# Altium PCB TANK_PCB.PcbDoc
Units mm, origin at the board's own origin, x right, y up, seen from the top; angles counter-clockwise.
Board outline 53.85 x 58.29 mm, 2 copper layers (Top Layer, Bottom Layer); 13 components, 16 nets, 86 pads, 0 vias.
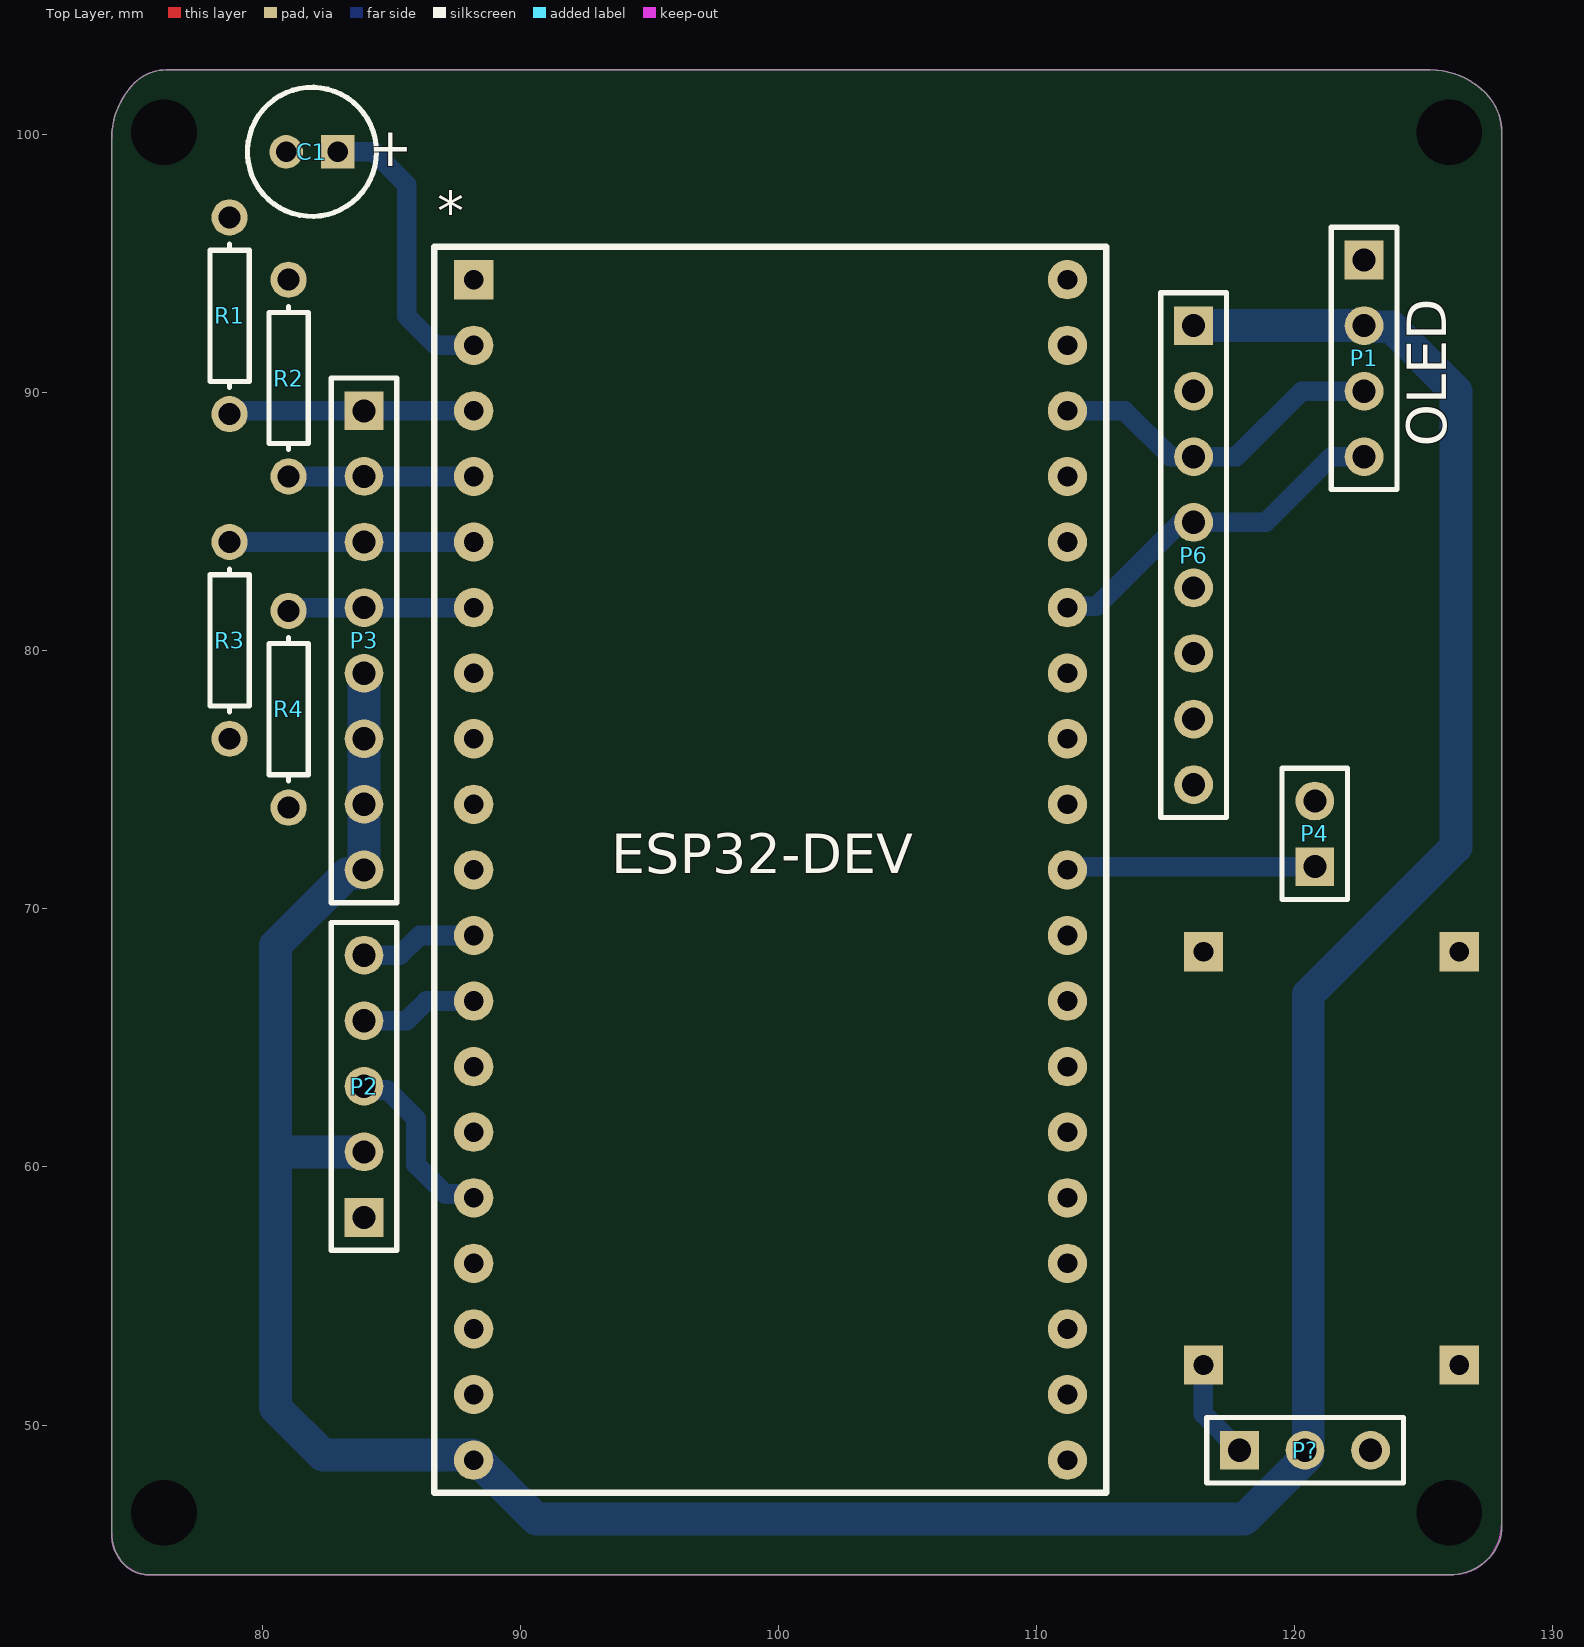
[diagram p0: Top Layer view]
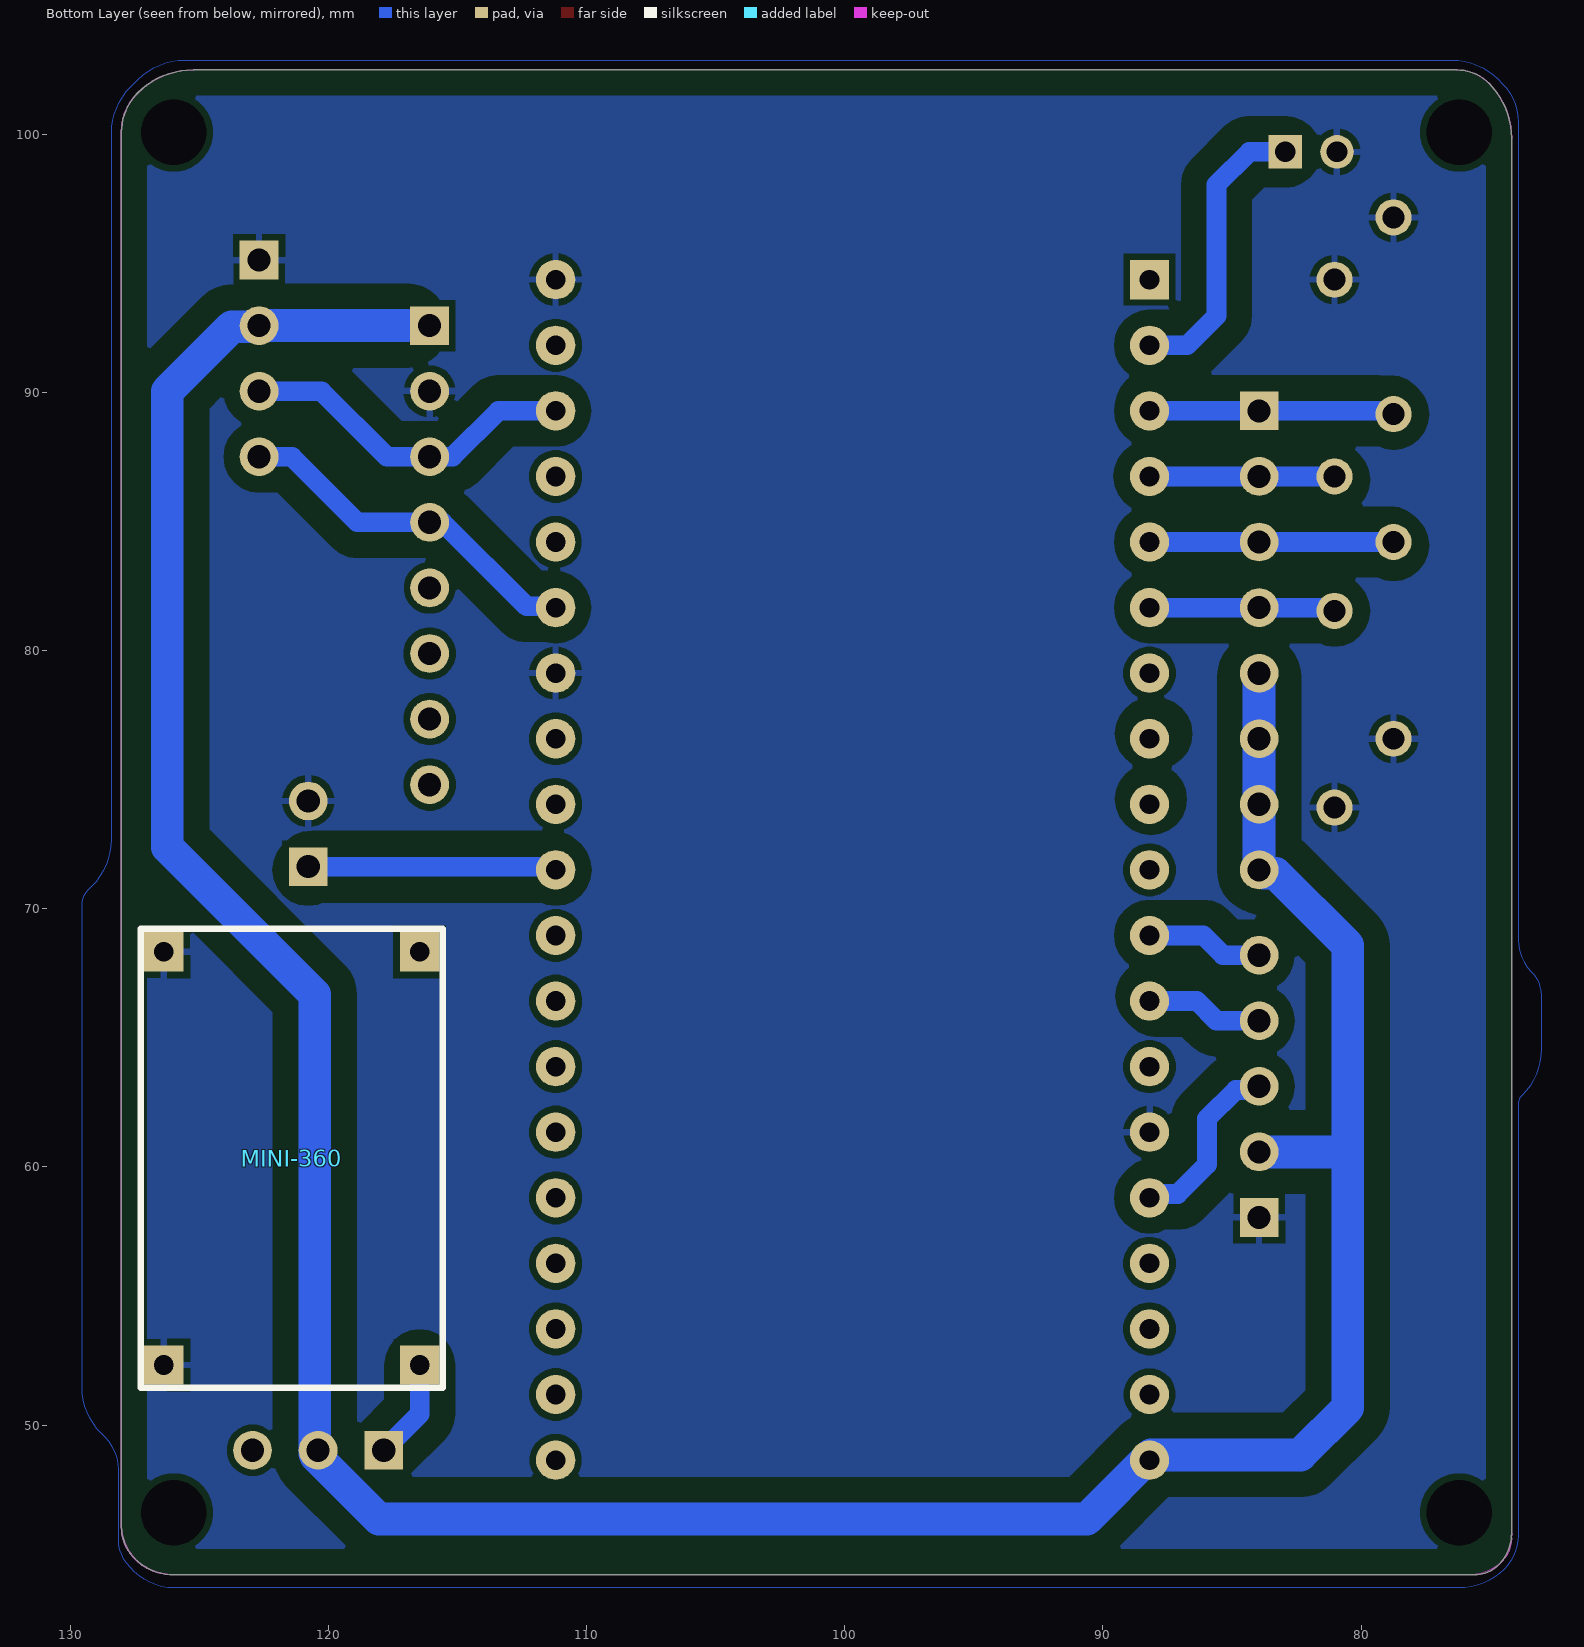
[diagram p1: Bottom Layer view, seen from below]

## Layer stack, top to bottom
Top Solder: solder mask 0.0102, Solder Resist, Dk 3.5
Top Layer: signal copper 0.0356
Dielectric 1: dielectric 0.32, FR-4, Dk 4.8
Bottom Layer: signal copper 0.0356
Bottom Solder: solder mask 0.0102, Solder Resist, Dk 3.5

## Board outline
74.676,44.577 cw(c75.902,45.803) 74.168,45.803 74.168,99.835 cw(c77.203,99.835) 75.057,101.981 cw(c76.283,100.755) 76.283,102.489 125.235,102.489 cw(c125.235,99.454) 127.381,101.6 cw(c125.848,100.067) 128.016,100.067 128.016,46.057 cw(c126.282,46.057) 127.508,44.831 cw(c125.975,46.364) 125.975,44.196 75.596,44.196 cw(c75.596,45.497)

## Design rules (kind name [scope] priority, off if disabled: settings)
Clearance [All] p1: gap=0.254 ignorepadtopadclearanceinfootprint=FALSE except(0: SMDPad-Hole THPad-Hole Via-Hole Fill-Hole Poly-Hole Region-Hole Text-Hole; 0.127: Arc-Hole Track-Hole; 1: Arc-Arc Arc-Track Arc-Fill Arc-Poly Arc-Region Track-Track Track-Fill Track-Poly Track-Region)
PolygonConnect [All] p1: connectstyle=Relief reliefconductorwidth=0.254 reliefentries=4 polygonreliefangle="90 Angle" airgapwidth=0.254
RoutingVias [All] p1: holewidth=0.711 width=1.27 viastyle="Through Hole" minholewidth=0.711 minwidth=1.27 maxholewidth=0.711 maxwidth=1.27
SolderMaskExpansion [All] p1: expansion=0.102 istentingtop=FALSE
Width [All] p1: maxlimit=1.27 minlimit=0.762 preferedwidth=1.016 minimp=50.000000 maximp=50.000000 favimp=50.000000
30 further rules are at their usual default settings.

## Components (designator, comment, footprint, x,y, rotation, side; value= is the part's Value field where it differs from the comment)
* "ESP32-WROOM-32D DEV_BOARD" PCBComponent_1 88.193,94.361 r0 top
C1 "ECA1HM100" CAPPR55-200-1100X500X1200 81.931,99.314 r180 top value=10µF
MINI-360 "MINI-360" MINI-360 122.561,57.023 r90 bottom
P1 "OLED" HDR1X4 122.682,95.123 r270 top
P2 "Joystick" HDR1X5 83.947,58.039 r90 top
P3 "FING" HDR1X8 83.947,89.281 r270 top
P4 "VIB" HDR1X2 120.777,71.628 r90 top
P6 "GY-521" HDR1X8 116.078,92.583 r270 top
P? "SWITCH" HDR1X3 117.856,49.022 r0 top
R1 "" AXIAL-0.3 78.74,92.964 r270 top value=100K
R2 "" AXIAL-0.3 81.026,90.551 r270 top value=100K
R3 "" AXIAL-0.3 78.74,80.391 r90 top value=100K
R4 "" AXIAL-0.3 81.026,77.724 r90 top value=100K

## Footprints (in the part's own frame and the unit in brackets; to place one, negate y for a bottom-side part, rotate by r counter-clockwise, add the part's x,y. Pads: shape width x height; smd on the part's side, far side on the other; paste and mask are expansions set on the pad)
AXIAL-0.3 [mm] "Axial Device, Thru-Hole; 2 Leads; 0.3 in Pin Spacing"
  round 1.4 hole 0.85: 1(-3.81,0) 2(3.81,0)
  silkscreen extent -2.77,-0.76 2.77,0.76
CAPPR55-200-1100X500X1200 [mm] "THD, 2-Leads, Dia 5mm, Pin Spacing 2mm"
  rect 1.3x1.3 hole 0.8: 1(-1,0)
  round 1.3 hole 0.8: 2(1,0)
  silkscreen extent -2.5,-2.5 2.5,2.5, body extent -2.5,-2.5 2.45,2.5, height 12
HDR1X2 [mm] "Connector; Header; 2 Position"
  rect 1.5x1.5 hole 0.9: 1(0,0)
  round 1.5 hole 0.9: 2(2.54,0)
  silkscreen extent -1.27,-1.27 3.81,1.27
HDR1X3 [mm] "Connector; Header; 3 Position"
  rect 1.5x1.5 hole 0.9: 1(0,0)
  round 1.5 hole 0.9: 2(2.54,0) 3(5.08,0)
  silkscreen extent -1.27,-1.27 6.35,1.27
HDR1X4 [mm] "Connector; Header; 4 Position"
  rect 1.5x1.5 hole 0.9: 1(0,0)
  round 1.5 hole 0.9: 2(2.54,0) 3(5.08,0) 4(7.62,0)
  silkscreen extent -1.27,-1.27 8.89,1.27
HDR1X5 [mm] "Connector; Header; 5 Position"
  rect 1.5x1.5 hole 0.9: 1(0,0)
  round 1.5 hole 0.9: 2(2.54,0) 3(5.08,0) 4(7.62,0) 5(10.16,0)
  silkscreen extent -1.27,-1.27 11.43,1.27
HDR1X8 [mm] "Connector; Header; 8 Position"
  rect 1.5x1.5 hole 0.9: 1(0,0)
  round 1.5 hole 0.9: 2(2.54,0) 3(5.08,0) 4(7.62,0) 5(10.16,0) 6(12.7,0) 7(15.24,0) 8(17.78,0)
  silkscreen extent -1.27,-1.27 19.05,1.27
MINI-360 [mil]
  rect 60x60 hole 30: 1(-185,150) 2(445,150) 3(-185,-240) 4(445,-240)
  silkscreen extent -220,-275 480,185, body extent -224,-281 485,191, height 88
PCBComponent_1 [mil]
  rect 60x60 hole 30: 1(0,0)
  round 60 hole 30: 2(0,-100) 3(0,-200) 4(0,-300) 5(0,-400) 6(0,-500) 7(0,-600) 8(0,-700) 9(0,-800) 10(0,-900) 11(0,-1000) 12(0,-1100) 13(0,-1200) 14(0,-1300) 15(0,-1400) 16(0,-1500) 17(0,-1600) 18(0,-1700) 19(0,-1800) 20(905.51,-1800) 21(905.51,-1700) 22(905.51,-1600) 23(905.51,-1500) 24(905.51,-1400) 25(905.51,-1300) 26(905.51,-1200) 27(905.51,-1100) 28(905.51,-1000) 29(905.51,-900) 30(905.51,-800) 31(905.51,-700) 32(905.51,-600) 33(905.51,-500) 34(905.51,-400) 35(905.51,-300) 36(905.51,-200) 37(905.51,-100) 38(905.51,0)
  silkscreen extent -60,-1850 965,50

## Part data
C1: library part CMP-001-00025-7, "Aluminum Electrolytic Capacitor, 10 uF, +/- 20%, 50 V, -40 to 85 degC, 2-Pin THD, RoHS, Bulk", Capacitor Type=Electrolytic, Case/Package=Radial, Manufacturer=Panasonic, Max Operating Temperature=85°C, Min Operating Temperature=-40°C, Package Description="2-Pin Radial Lead, Dia 5 mm, Height 12 mm", Package Quantity=200, Package Reference=CAPPR55-200-1100X500X1200, Ripple Current=65mA, Tolerance=20%, Voltage Rating=50V, Datasheet URL=https://industrial.panasonic.com/cdbs/www-data/pdf/RDF0000/ABA0000C1218.pdf, Datasheet Version="Rev. 05, 10/2016", Diameter=5mm, Lead Pitch=2mm, Manufacturer URL=http://www.panasonic.com/, Mounting Technology=TH, Packaging=Bulk, Pins=2, Ripple Current (AC)=65mA, RoHS Compliant=True
MINI-360: library part CMP-004-000006-1, Design Item ID=MINI-360, Source=MINI-360.SchLib
P1: library part "Header 4", "Header, 4-Pin", LatestRevisionDate=17-Jul-2002, LatestRevisionNote="Re-released for DXP Platform.", Publisher="Altium Limited"
P2: library part "Header 5", "Header, 5-Pin", LatestRevisionDate=17-Jul-2002, LatestRevisionNote="Re-released for DXP Platform.", Publisher="Altium Limited"
P3 P6: library part "Header 8", "Header, 8-Pin", LatestRevisionDate=17-Jul-2002, LatestRevisionNote="Re-released for DXP Platform.", Publisher="Altium Limited"
P4: library part "Header 2", "Header, 2-Pin", LatestRevisionDate=17-Jul-2002, LatestRevisionNote="Re-released for DXP Platform.", Publisher="Altium Limited"
P?: library part "Header 3", "Header, 3-Pin", LatestRevisionDate=17-Jul-2002, LatestRevisionNote="Re-released for DXP Platform.", Publisher="Altium Limited"
R1 R2 R3 R4: library part Res1, "Resistor", LatestRevisionDate=17-Jul-2002, LatestRevisionNote="Re-released for DXP Platform.", PackageDescription="Axial Device, Thru-Hole; 2 Leads; 0.3 in Pin Spacing", PackageReference=AXIAL-0.3, Published=8-Jun-2000, Publisher="Altium Limited"

## Free pads (board coordinates)
  round 2.254 hole 2.54: 2(125.984,100.076) 3(76.2,100.076) 4(76.2,46.609) 5(125.984,46.609)

## Nets (pads, with @x,y where several pads share a name; then routed paths per layer and width w, separated by ;. In a path a pad name is that pad's centre, name@x,y a point inside that pad or via, vN(x,y) a via of type N, cw(c..) or ccw(c..) an arc to the next point about the centre after c; other vN are vias at no path point)
3V3: *.1
+5: *.19 P1.2 P2.2 P3.5 P3.6 P3.7 P3.8 P6.1 P?.2 | length 130.1
  Bottom Layer w1.27: P3.8@83.885,71.457 83.841,71.457 83.758,71.374 83.312,71.374 80.518,68.58 80.518,60.706 ; P2.2 83.944,60.576 80.648,60.576 80.518,60.706 ; P3.8@83.947,71.457 P3.5@83.947,78.994 ; 116.967,92.583 P1.2@122.62,92.583 ; P?.2@120.523,48.895 120.481,48.895 120.481,48.795 118.04,46.355 90.626,46.355 88.138,48.843 82.348,48.843 80.518,50.673 80.518,60.706 ; P?.2@120.523,48.957 120.523,66.675 126.238,72.39 126.238,90.043 123.742,92.539 122.726,92.539 P1.2
GND: *.14 *.32 *.38 C1.2 MINI-360.1 MINI-360.2 P1.1 P2.1 P4.2 P6.2 R1.1 R2.1 R3.1 R4.1
IO5: *.29 P4.1 | length 9.8
  Bottom Layer w0.762: *.29 111.32,71.628 P4.1@120.65,71.628 ; P4.1@120.739,71.539 P4.1@120.65,71.628 ; P4.1@120.777,71.501 P4.1@120.65,71.628
IO13: *.15 P2.3 | length 7.1
  Bottom Layer w0.762: P2.3 84.088,62.978 84.85,62.978 85.963,61.865 85.963,60.087 87.103,58.947 88.047,58.947 *.15
IO14: *.12 P2.4 | length 4.6
  Bottom Layer w0.762: P2.4 85.598,65.659 86.36,66.421 87.936,66.421 *.12@88.138,66.623
IO21: *.33 P1.4 P6.4 | length 13.9
  Bottom Layer w0.762: *.33 111.24,81.708 112.315,81.708 115.57,84.963 116.967,84.963 118.872,84.963 121.407,87.498 122.677,87.498 P1.4
IO22: *.36 P1.3 P6.3 | length 13.3
  Bottom Layer w0.762: *.36 113.411,89.281 115.184,87.508 116.078,87.508 116.083,87.503 117.729,87.503 120.264,90.038 122.677,90.038 P1.3
IO27: *.11 P2.5 | length 4.6
  Bottom Layer w0.762: P2.5 85.344,68.199 86.106,68.961 *.11
IO34: *.5 P3.3 R3.2 | length 9.5
  Bottom Layer w0.762: R3.2@78.74,84.074 78.862,84.196 79.313,84.196 79.318,84.201 P3.3 *.5
IO35: *.6 P3.4 R4.2 | length 7.2
  Bottom Layer w0.762: R4.2 81.148,81.656 81.726,81.656 81.731,81.661 P3.4 *.6
Net*_2: *.2 C1.1 | length 11.3
  Bottom Layer w0.762: C1.1 84.328,99.314 85.598,98.044 85.598,92.964 86.741,91.821 *.2
NetMINI-360_3: MINI-360.3 P?.1 | length 3.9
  Bottom Layer w0.762: MINI-360.3@116.459,52.324 116.459,50.419 P?.1
S_VN: *.4 P3.2 R2.2 | length 7.2
  Bottom Layer w0.762: R2.2@81.026,86.614 81.148,86.736 81.726,86.736 81.731,86.741 P3.2 *.4@88.218,86.741
VCC: MINI-360.4
VP: *.3 P3.1 R1.2 | length 9.9
  Bottom Layer w0.762: R1.2 78.862,89.276 79.313,89.276 79.318,89.281 P3.1 P3.1@84.074,89.281 ; P3.1@83.947,89.154 P3.1@84.074,89.281 ; *.3@87.985,89.33 *.3@88.138,89.483 ; *.3 P3.1@84.074,89.281
pads on no net: *.7 *.8 *.9 *.10 *.13 *.16 *.17 *.18 *.20 *.21 *.22 *.23 *.24 *.25 *.26 *.27 *.28 *.30 *.31 *.34 *.35 *.37 P6.5 P6.6 P6.7 P6.8 P?.3
copper on no net: | length 0.2
  Bottom Layer w0.762: 87.922,76.783 88.138,76.783

## Polygon pours and split planes (outlines as drawn)
GND on Bottom Layer "Bottom Layer-GND" (solid, pour order 7): 76.283,102.489 ccw(c76.283,100.755) 75.057,101.981 74.912,101.836 ccw(c76.708,100.04) 74.168,100.04 74.168,45.983 ccw(c76.336,45.983) 74.803,44.45 ccw(c75.416,45.063) 75.416,44.196 126.111,44.196 ccw(c126.111,46.036) 127.412,44.735 127.635,44.958 ccw(c126.715,45.878) 128.016,45.878 128.016,99.913 ccw(c125.476,99.913) 127.272,101.709 127.127,101.854 ccw(c125.594,100.321) 125.594,102.489 123.952,102.489
GND on Bottom Layer "NONET_L02_P000" (solid, shelved, pour order 0): 76.49,102.87 ccw(c76.49,100.33) 74.694,102.126 74.54,101.972 ccw(c76.051,100.461) 73.914,100.461 73.914,68.79 cw(c72.18,68.79) 73.406,67.564 ccw(c74.326,66.644) 73.025,66.644 73.025,64.552 ccw(c75.565,64.552) 73.769,62.756 73.787,62.738 cw(c73.48,62.431) 73.914,62.431 73.914,45.72 ccw(c75.754,45.72) 74.453,44.419 ccw(c76.218,46.184) 76.218,43.688 125.975,43.688 ccw(c125.975,45.856) 127.508,44.323 127.679,44.494 ccw(c126.606,45.567) 128.124,45.567 128.124,48.27 cw(c129.893,48.27) 128.642,49.521 128.796,49.675 ccw(c127,51.471) 129.54,51.471 129.54,70.139 ccw(c128.704,70.139) 129.295,70.73 129.141,70.884 cw(c130.937,72.68) 128.397,72.68 128.397,100.04 ccw(c125.857,100.04) 127.653,101.836 127.363,102.126 ccw(c125.567,100.33) 125.567,102.87 125.375,102.87

## Keep-outs
Keep-Out Layer:
  lines w0.001: 74.168,45.803 ccw(c75.902,45.803) 74.676,44.577 ; 74.168,45.803 ccw(c75.902,45.803) 74.676,44.577 ; 74.168,45.803 74.168,99.835 ; 74.168,45.803 74.168,99.835 ; 74.168,99.835 cw(c77.203,99.835) 75.057,101.981 ; 74.168,99.835 cw(c77.203,99.835) 75.057,101.981 ; 74.168,99.835 cw(c77.203,99.835) 75.057,101.981 ; 74.168,99.835 74.168,45.624 ccw(c75.469,45.624) 74.549,44.704 ccw(c75.775,45.93) 75.775,44.196 126.155,44.196 ccw(c126.155,45.93) 127.381,44.704 ccw(c125.848,46.237) 128.016,46.237 128.016,100.08 ccw(c125.879,100.08) 127.39,101.591 ccw(c125.222,99.423) 125.222,102.489 76.283,102.489 ; 74.676,44.577 ccw(c75.596,45.497) 75.596,44.196 ; 74.676,44.577 ccw(c75.596,45.497) 75.596,44.196 ; 75.057,101.981 cw(c76.283,100.755) 76.283,102.489 ; 75.057,101.981 cw(c76.283,100.755) 76.283,102.489 ; 75.057,101.981 cw(c76.283,100.755) 76.283,102.489 ; 75.596,44.196 125.975,44.196 ; 75.596,44.196 125.975,44.196 ; 76.283,102.489 125.235,102.489 ; 76.283,102.489 125.235,102.489 ; 125.235,102.489 cw(c125.235,99.454) 127.381,101.6 ; 125.235,102.489 cw(c125.235,99.454) 127.381,101.6 ; 125.975,44.196 ccw(c125.975,46.364) 127.508,44.831 ; 125.975,44.196 ccw(c125.975,46.364) 127.508,44.831 ; 127.381,101.6 cw(c125.848,100.067) 128.016,100.067 ; 127.381,101.6 cw(c125.848,100.067) 128.016,100.067 ; 127.508,44.831 ccw(c126.282,46.057) 128.016,46.057 ; 127.508,44.831 ccw(c126.282,46.057) 128.016,46.057 ; 128.016,46.057 128.016,100.067 ; 128.016,46.057 128.016,100.067

## Silkscreen, mask and mechanical layers (free items; w line width, h text height)
Mechanical 1:
  lines w0.254: 74.168,45.803 ccw(c75.902,45.803) 74.676,44.577 ccw(c75.596,45.497) 75.596,44.196 125.975,44.196 ccw(c125.975,46.364) 127.508,44.831 ccw(c126.282,46.057) 128.016,46.057 128.016,100.067 ccw(c125.848,100.067) 127.381,101.6 ccw(c125.235,99.454) 125.235,102.489 77.851,102.489 76.283,102.489 ccw(c76.283,100.755) 75.057,101.981 ccw(c77.203,99.835) 74.168,99.835 74.168,45.803

## Dimensions
125.235,102.489 to 125.975,44.196 on Mechanical 1
74.168,99.835 to 128.016,100.067 on Mechanical 1
76.2,46.609 to 75.596,44.196 on Mechanical 1
76.2,46.609 to 74.168,45.803 on Mechanical 1
125.984,46.609 to 125.975,44.196 on Mechanical 1
125.984,46.609 to 128.016,46.057 on Mechanical 1
125.984,100.076 to 125.235,102.489 on Mechanical 1
125.984,100.076 to 128.016,100.067 on Mechanical 1
76.2,100.076 to 76.283,102.489 on Mechanical 1
76.2,100.076 to 74.168,99.835 on Mechanical 1

## Text inside footprints (layer, text, board x,y; h text height)
*: Top Overlay "ESP32-DEV" at 93.527,71.374 h1.52
C1: Top Overlay "+" at 85.839,100.051 h1.5 r180
MINI-360: Mechanical 1 "OUT+" at 116.084,63.5 h1 r270; Mechanical 1 "OUT-" at 125.863,63.373 h1 r270; Mechanical 1 "IN+" at 116.084,53.594 h1 r270; Mechanical 1 "IN-" at 125.736,53.594 h1 r270